# Altium PCB projet_pcb_F103.PCBDOC
Units mil, origin at the board's own origin, x right, y up, seen from the top; angles counter-clockwise.
Board outline 2810 x 2750 mil, 2 copper layers (TopLayer, BottomLayer); 21 components, 20 nets, 106 pads, 14 vias.
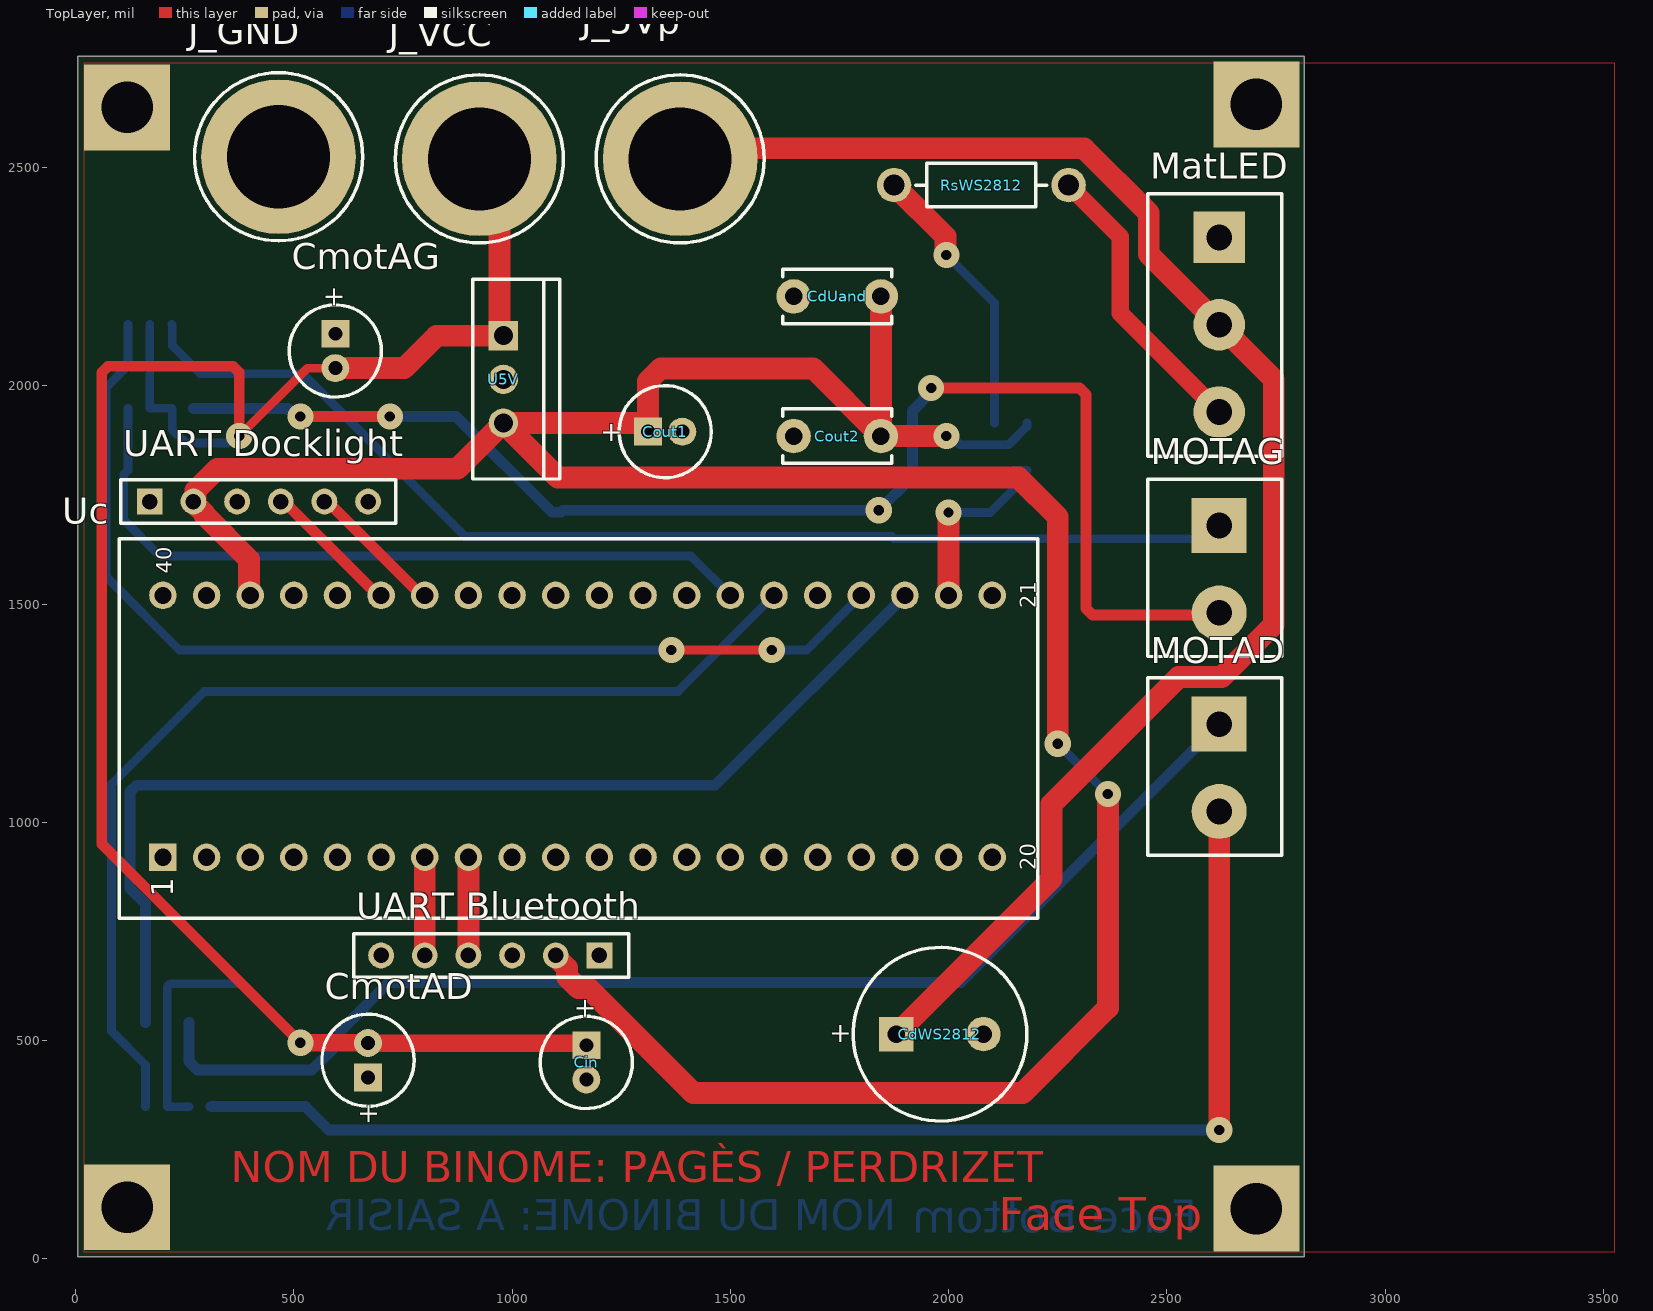
[diagram p0: TopLayer view]
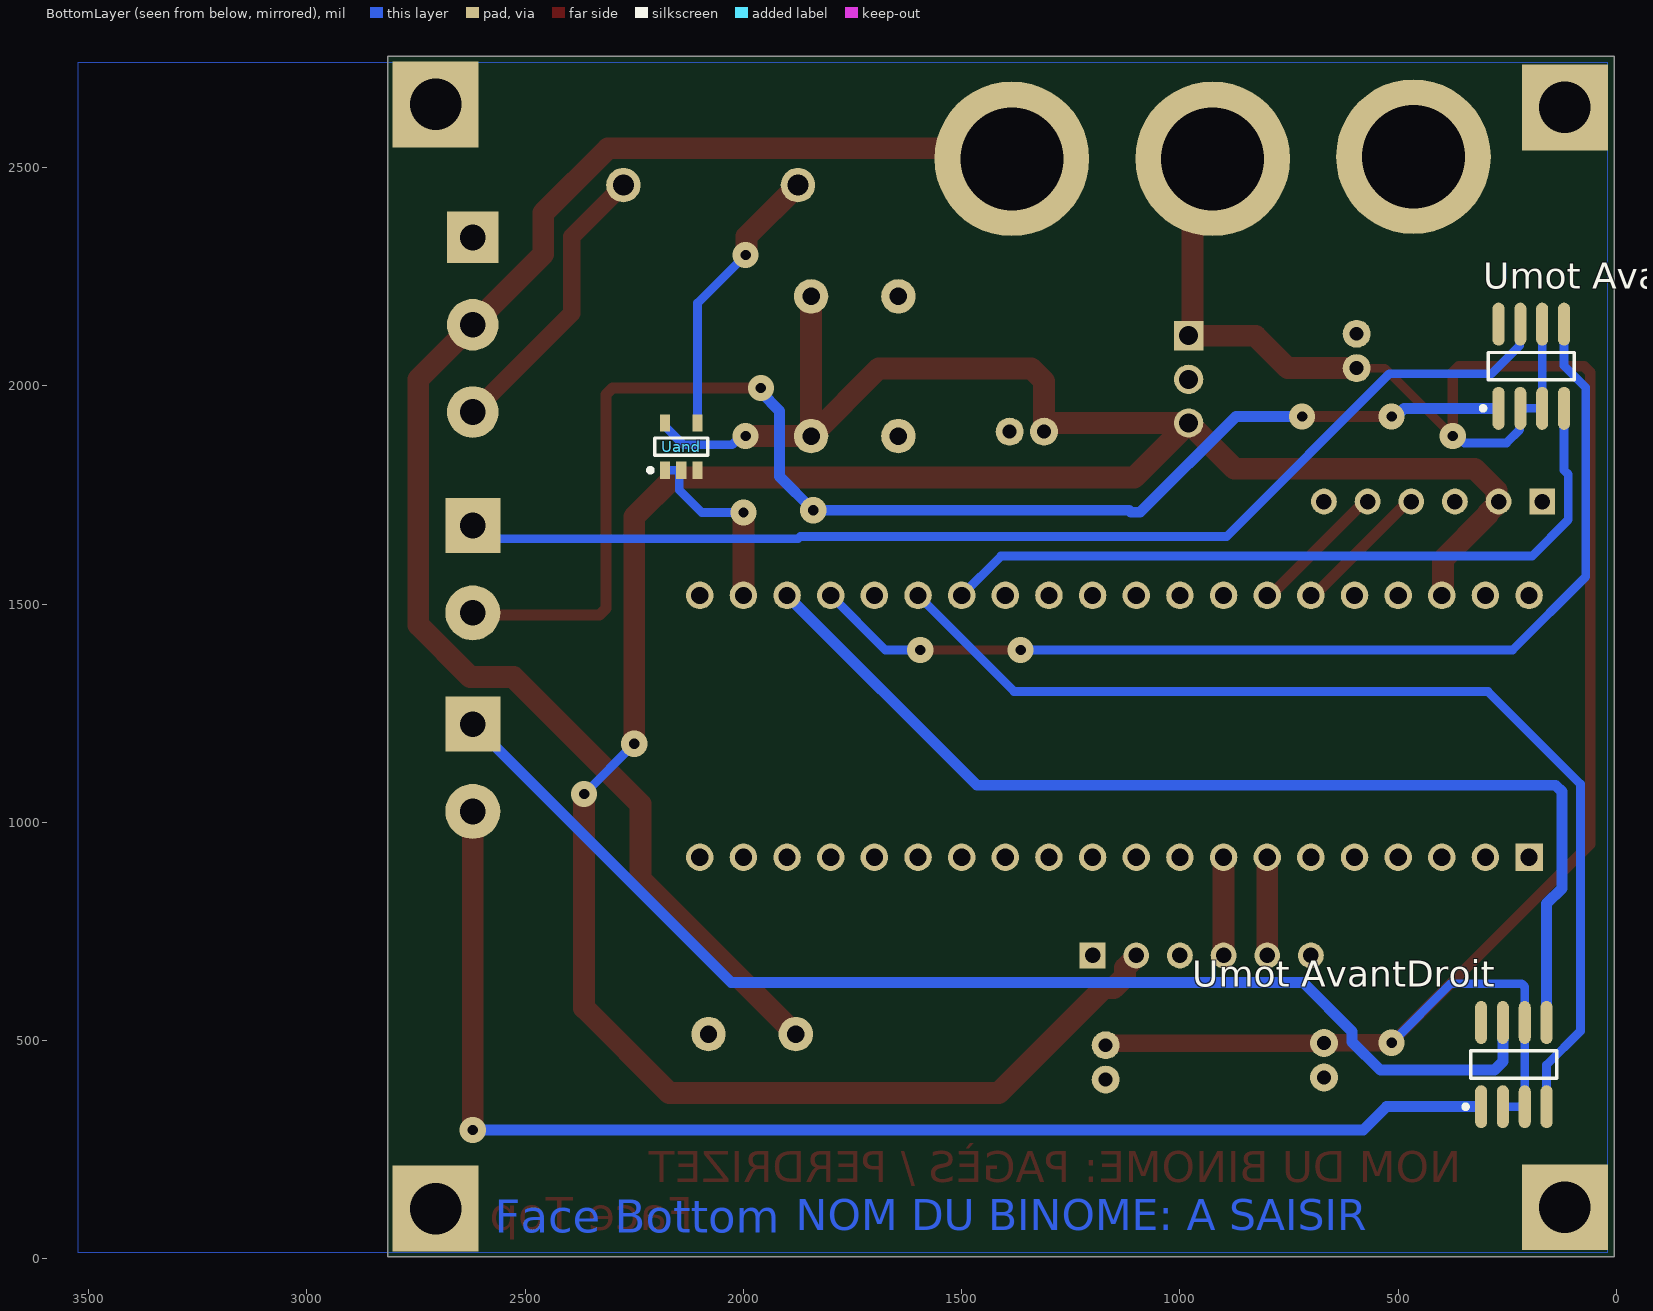
[diagram p1: BottomLayer view, seen from below]

## Layer stack, top to bottom
TopSolder: solder mask 0.4, Solder Resist, Dk 3.5
TopLayer: signal copper 1.4
Dielectric1: core 12.6, FR-4, Dk 4.8
BottomLayer: signal copper 1.4
BottomSolder: solder mask 0.4, Solder Resist, Dk 3.5

## Board outline
5,5 5,2755 2815,2755 2815,5
cut-out: 3005,2870
cut-out: 3340,-80

## Design rules (kind name [scope] priority, off if disabled: settings)
Clearance PowerPlaneClearance [InNamedPolygon('Bot-GND') Or  InNamedPolygon('Top-GND')] p1: gap=40 ignorepadtopadclearanceinfootprint=FALSE except(0: Arc-Hole Track-Hole SMDPad-Hole THPad-Hole Via-Hole Fill-Hole Poly-Hole Region-Hole Text-Hole)
Clearance [All] p2: gap=20 ignorepadtopadclearanceinfootprint=TRUE except(0: Arc-Hole Track-Hole SMDPad-Hole THPad-Hole Via-Hole Fill-Hole Poly-Hole Region-Hole Text-Hole)
FabricationTestPointUsage TestPointUsage [All] p1: valid=0 allowmultiple=FALSE
FabricationTestpoint Testpoint [All] p1: side=3 testpointundercomponent=TRUE minsize=40 maxsize=100 preferedsize=60 minholesize=20 maxholesize=40 preferedholesize=32 testpointgrid=1 allowsidetop=TRUE allowsidebottom=TRUE usegrid=TRUE gridtolerance=0.01
Height [All] p1: minheight=0 maxheight=2000 prefheight=500
HoleSize [All] p1: absolutevalues=TRUE maxlimit=300 minlimit=11.81 maxpercent=80.000 minpercent=20.000
PlaneClearance [All] p1: clearance=40
PlaneConnect [All] p1: planeconnectstyle=Relief reliefexpansion=19.68 reliefentries=4 reliefconductorwidth=40 reliefairgap=19.68
PolygonConnect [All] p1: connectstyle=Relief reliefconductorwidth=40 reliefentries=4 polygonreliefangle="90 Angle" airgapwidth=10
RoutingVias [All] p1: holewidth=23.62 width=60 viastyle="Through Hole" minholewidth=23.62 minwidth=60 maxholewidth=23.62 maxwidth=60
SilkToSolderMaskClearance SilkscreenOverComponentPads [IsPad] p1: minsilkscreentomaskgap=10 clearancetoexposedcopper=TRUE
SolderMaskExpansion [All] p1: expansion=2
Width [All] p1: maxlimit=1000 minlimit=20 preferedwidth=40
23 further rules are at their usual default settings.

## Classes and differential pairs
component class projet_pcb_F103: CdUand CdWS2812 Cin CmotAG Cout1 Cout2 J_5Vp J_GND J_VCC MatLED MOTAD MOTAG RsWS2812 U5V Uand "UART Bluetooth" "UART Docklight" "Umot AvantDroit" "Umot AvantGauche"

## Components (designator, comment, footprint, x,y, rotation, side; value= is the part's Value field where it differs from the comment)
CdUand "CONDENSATEUR_CER_RAD_5.08" CONDENSATEUR_CERAMIQUE_RADIAL_5.08 1645,2205 r0 top value=100nF
CdWS2812 "CONDENSATEUR_POL_ELECTROLY_RAD_5.08/10.16" CONDENSATEUR_POLARISE_ELECTROLYTIQUE_RADIAL_5.08/10.16 1880,515 r0 top value=470µF/25V
Cin "CONDENSATEUR_POL_ELECTROLY_RAD_2.0/5.08" CONDENSATEUR_POLARISE_ELECTROLYTIQUE_RADIAL_2.0/5.08 1170,450 r270 top value=10µF/>25V
CmotAD "10uF" CONDENSATEUR_POLARISE_ELECTROLYTIQUE_RADIAL_2.0/5.08 670,455 r90 top
CmotAG "10uF" CONDENSATEUR_POLARISE_ELECTROLYTIQUE_RADIAL_2.0/5.08 595,2080 r270 top
Cout1 "CONDENSATEUR_POL_ELECTROLY_RAD_2.0/5.08" CONDENSATEUR_POLARISE_ELECTROLYTIQUE_RADIAL_2.0/5.08 1350.63,1895 r0 top value=1µF/>10V
Cout2 "CONDENSATEUR_CER_RAD_5.08" CONDENSATEUR_CERAMIQUE_RADIAL_5.08 1645,1885 r0 top
J_5Vp "DOUILLE BANANE 4mm" DOUILLE_BANANE_4mm#1 1385,2520 r0 top
J_GND "DOUILLE BANANE 4mm" DOUILLE_BANANE_4mm#2 465,2525 r0 top
J_VCC "DOUILLE BANANE 4mm" DOUILLE_BANANE_4mm#2 925,2520 r0 top
MatLED "BORNIER3 DROIT A VIS" BORNIER3_A_VIS 2620,2340 r270 top
MOTAD "BORNIER2 DROIT A VIS" BORNIER2_A_VIS 2620,1225 r270 top
MOTAG "BORNIER2 DROIT A VIS" BORNIER2_A_VIS 2620,1680 r270 top
RsWS2812 "220" RESISTANCE_1/4W 2275,2460 r180 top
U5V "REGULATEUR_TO220_78XX" REGULATEUR_TO220_78XX 980,2015 r270 top
Uand "SN74AHCT1G08DBVR" DBV0005A_N 2142.4,1860.87 r90 bottom
"UART Bluetooth" "BARRETTE_6 CONTACTS_1 RANGEE_FEMELLE_DROITE" BARRETTE_6_F_D 1200,695 r180 top
"UART Docklight" "BARRETTE_6 CONTACTS_1 RANGEE_FEMELLE_DROITE" BARRETTE_6_F_D 170,1735 r0 top
Uc "STM32F103C8T6/PCB_DIP40" STM32F103C8T6_DIP40 200,920 r90 top
"Umot AvantDroit" "BD6221F-E2" SOIC8_PAS=1.27_LARG=4_LONG=5 235,445 r90 bottom
"Umot AvantGauche" "BD6221F-E2" SOIC8_PAS=1.27_LARG=4_LONG=5 195,2045 r90 bottom

## Footprints (in the part's own frame and the unit in brackets; to place one, negate y for a bottom-side part, rotate by r counter-clockwise, add the part's x,y. Pads: shape width x height; smd on the part's side, far side on the other; paste and mask are expansions set on the pad)
BARRETTE_6_F_D [mm] "BARRETTE 6 CONTACTS ; 1 RANGEE ; DROITE ; FEMELLE ; ESPACEMENT BROCHES = 2.54 mm"
  rect 1.5x1.5 hole 0.9: 1(0,0)
  round 1.5 hole 0.9: 2(2.54,0) 3(5.08,0) 4(7.62,0) 5(10.16,0) 6(12.7,0)
  silkscreen extent -1.7,-1.27 14.3,1.27, body extent -1.57,-1.2 14.17,1.21, height 8.5
BORNIER2_A_VIS [mm] "BORNIER 2 PLOTS A VIS ; VERTICAL ; ESPACEMENT BROCHES = 5.08mm"
  rect 3.2x3.2 hole 1.5: 1(0,0)
  round 3.2 hole 1.5: 2(5.08,0)
  silkscreen extent -2.69,-4.15 7.62,3.63, body extent -2.5,-4 7.5,3.5, height 10
BORNIER3_A_VIS [mm] "BORNIER 3 PLOTS A VIS ; VERTICAL ; ESPACEMENT BROCHES = 5.08mm"
  rect 3x3 hole 1.5: 1(0,0)
  round 3 hole 1.5: 2(5.08,0) 3(10.16,0)
  silkscreen extent -2.54,-4.16 12.74,3.64, body extent -2.4,-4 12.6,3.5, height 10
CONDENSATEUR_CERAMIQUE_RADIAL_5.08 [mil] "CONDENSATEUR TRAVERSANT CERAMIQUE RADIAL ; DIMENSIONS : 3.17mm x 5.08mm"
  round 79 hole 40: 1(0,0) 2(200,0)
  silkscreen extent -25,-62 225,62, body extent -11,-43 209,42, height 148
CONDENSATEUR_POLARISE_ELECTROLYTIQUE_RADIAL_2.0/5.08 [mil] "CONDENSATEUR POLARISE ELECTROLYTIQUE RADIAL ; DIAMETRE : 5.08mm ; ESPACEMENT BROCHES : 2mm"
  rect 64x64 / inner round 64 / far side round 64 hole 32: 1(-39.37,0)
  round 64 hole 32: 2(39.37,0)
  silkscreen extent -106,-105 106,106, body extent -98,-98 98,98, height 433
CONDENSATEUR_POLARISE_ELECTROLYTIQUE_RADIAL_5.08/10.16 [mil] "CONDENSATEUR POLARISE ELECTROLYTIQUE RADIAL ; DIAMETRE : 10.16mm ; ESPACEMENT BROCHES : 5.08mm"
  rect 79x79 / inner round 79 / far side round 79 hole 40: 1(0,0)
  round 79 hole 40: 2(200,0)
  silkscreen extent -98,-199 299,198, body extent -98,-197 295,197, height 630
DBV0005A_N [mm] "SOT23, 5-Leads, Body 3.05x1.75mm, Pitch 0.95mm, IPC Medium Density"
  rect 1x0.6 smd: 1(-1.375,0.95) 2(-1.375,0) 3(-1.375,-0.95) 4(1.375,-0.95) 5(1.375,0.95)
  silkscreen extent -1.5,-1.55 0.5,1.93, body extent -1.42,-1.46 1.42,1.46, height 1.08
DOUILLE_BANANE_4mm#1 [mm] "DOUILLE BANANE ; DIAMETRE PASSAGE CONTACT = 4 mm ; DIAMETRE PERCAGE = 6 mm"
  round 9 hole 6: 1(0,0)
  TopLayer pour cut-out: -5.55,2.35 -4.2,4.3 -2.3,5.6 0,6 2.3,5.6 4.2,4.3 5.55,2.35 6,0 5.55,-2.35 4.3,-4.25 2.35,-5.55 0,-6 -2.35,-5.55 -4.2,-4.3 -5.55,-2.35 -6,0
  BottomLayer pour cut-out: -5.55,2.35 -4.2,4.3 -2.3,5.6 0,6 2.3,5.6 4.2,4.3 5.55,2.35 6,0 5.55,-2.35 4.3,-4.25 2.35,-5.55 0,-6 -2.35,-5.55 -4.2,-4.3 -5.55,-2.35 -6,0
  silkscreen extent -4.89,-4.89 4.89,4.89, body extent -5.5,-5.6 5.63,5.53, height 4.79
DOUILLE_BANANE_4mm#2 [mm] "DOUILLE BANANE ; DIAMETRE PASSAGE CONTACT = 4 mm ; DIAMETRE PERCAGE = 6 mm"
  round 9 hole 6: 1(0,0)
  silkscreen extent -4.89,-4.89 4.89,4.89, body extent -5.5,-5.6 5.63,5.53, height 4.79
REGULATEUR_TO220_78XX [mm] "BOITIER TO220 ; DIMENSIONS : 11.2mm x 4.7mm ; ESPACEMENT BROCHES : 2.54 mm"
  rect 1.7x1.7 hole 1.1: 1(-2.54,0)
  round 1.7 hole 1.1: 2(0,0) 3(2.54,0)
  silkscreen extent -5.83,-1.77 5.8,3.29, body extent -5.61,-1.59 5.61,3.1, height 19.33
RESISTANCE_1/4W [mil] "RESISTANCE 0.25W; DIAMETRE : 2.54mm ; LONGUEUR : 6.35mm ; PAS : 10.16mm"
  round 79 hole 48: 1(0,0) 2(400,0)
  silkscreen extent 50,-50 350,50, body extent -15,-47 409,44, height 116
SOIC8_PAS=1.27_LARG=4_LONG=5 [mm] "Small Outline Integrated Circuit ; 8 Leads ; Body Width = 4 mm ; Pitch = 1.27 mm ; IPC Low Density"
  oval 2.5x0.7 smd: 1(-2.45,1.905) 2(-2.45,0.635) 3(-2.45,-0.635) 4(-2.45,-1.905) 5(2.45,-1.905) 6(2.45,-0.635) 7(2.45,0.635) 8(2.45,1.905)
  silkscreen extent -2.57,-2.5 0.8,2.93, body extent -3.01,-2.5 3,2.5, height 1.75
STM32F103C8T6_DIP40 [mm] "STM32F103 monté sur DIP40"
  rect 1.6x1.6 hole 1: 1(0,0)
  round 1.6 hole 1: 2(0,-2.54) 3(0,-5.08) 4(0,-7.62) 5(0,-10.16) 6(0,-12.7) 7(0,-15.24) 8(0,-17.78) 9(0,-20.32) 10(0,-22.86) 11(0,-25.4) 12(0,-27.94) 13(0,-30.48) 14(0,-33.02) 15(0,-35.56) 16(0,-38.1) 17(0,-40.64) 18(0,-43.18) 19(0,-45.72) 20(0,-48.26) 21(15.24,-48.26) 22(15.24,-45.72) 23(15.24,-43.18) 24(15.24,-40.64) 25(15.24,-38.1) 26(15.24,-35.56) 27(15.24,-33.02) 28(15.24,-30.48) 29(15.24,-27.94) 30(15.24,-25.4) 31(15.24,-22.86) 32(15.24,-20.32) 33(15.24,-17.78) 34(15.24,-15.24) 35(15.24,-12.7) 36(15.24,-10.16) 37(15.24,-7.62) 38(15.24,-5.08) 39(15.24,-2.54) 40(15.24,0)
  silkscreen extent -3.56,-50.92 18.54,2.54, body extent -3.63,-51.04 18.37,6.1, height 20.63

## Part data
CdUand Cout2: "CONDENSATEUR TRAVERSANT CERAMIQUE RADIAL 5.08mm"
  CdUand: Type=RADIAL_5.08
CdWS2812: "CONDENSATEUR POLARISE ELECTROLYTIQUE RADIAL 5.08/10.16", Type=POL_RAD_5.08/10.16
Cin Cout1: "CONDENSATEUR POLARISE ELECTROLYTIQUE RADIAL 2.0/5.08", Type=POL_RAD_2.0/5.08
CmotAD CmotAG: library part Condensateur, "Capacitor", LatestRevisionDate=17-Jul-2002, LatestRevisionNote="Re-released for DXP Platform.", PackageReference=RAD-0.3, Published=8-Jun-2000, Publisher="Altium Limited"
J_5Vp J_GND J_VCC: library part DOUILLE_BANANE_4mm, "DOUILLE BANANE 4 mm", Type=BANANE_4mm
MatLED: library part "BORNIER3_DROIT_A VIS", "BORNIER 3 PLOTS DROIT A VIS 5.08mm", Type=BORNIER3_D
MOTAD MOTAG: library part "BORNIER2_DROIT_A VIS", "BORNIER 2 PLOTS DROIT A VIS 5.08mm", Type=BORNIER2_D
RsWS2812: library part Resistor, "Resistor", LatestRevisionDate=17-Jul-2002, LatestRevisionNote="Re-released for DXP Platform.", PackageReference=AXIAL-0.5, Published=8-Jun-2000, Publisher="Altium Limited"
U5V: "REGULATEUR DE TENSION POSITIVE 78XX BOITIER TO220", Package=(TO220), Type=7805
Uand: "Single 2-Input Positive-AND Gate, DBV0005A, LARGE T&R", F @ Nom Voltage(Max)(Mhz)=75, Generic Part Number=SN74AHCT1G08, ICC @ Nom Voltage(Max)(mA)=0.01, Manufacturer="Texas Instruments", Operating Temperature Range(C)="-40 to 125", Rating=Catalog, Supplier Part Number 1=595-SN74AHCT1G08DBVR, tpd @ Nom Voltage(Max)(ns)=7.1, Voltage(Nom)(V)=5, 3-State Output=No, Bits(#)=1, ComponentLink1Description="Manufacturer URL", ComponentLink1URL=http://www.ti.com/, ComponentLink2Description=Datasheet, ComponentLink2URL=http://www.ti.com/lit/ds/symlink/sn74ahct1g08.pdf, DatasheetVersion=SCLS315P, Gate Type=AND, Input Type=CMOS, Logic=True, Output Drive (IOL/IOH)(Max)(mA)=8/-8, Output Type=CMOS, PackageReference=DBV0005A, PartNumber=SN74AHCT1G08DBVR, Schmitt Trigger=No, Sub-Family="AND Gate", Supplier 1=Mouser, Supplier 2=Digi-Key, Supplier 3=Digi-Key, Supplier 4=Digi-Key, Supplier Part Number 2=296-1113-2-ND, Supplier Part Number 3=296-1113-1-ND, Supplier Part Number 4=296-1113-6-ND, Technology Family=AHCT, VCC(Max)(V)=5.5, VCC(Min)(V)=2
"UART Bluetooth" "UART Docklight": "BARRETTE 6 CONTACTS 1 RANGEE FEMELLE DROITE", Type=F_D_6
Uc: "MICROCONTROLEUR 32 BITS - 72MHz - 34 I/O - 64 KO : FLASH - 20KO RAM - 10 CANAUX A/D 12 BITS - DIP40 - UART, SPI, I2C, USB, CAN", Package=DIP40, Type=STM32F103C8T6
"Umot AvantDroit" "Umot AvantGauche": library part BD6220F, "H Bridge - 2A"

## Free pads (board coordinates)
  rect 196.85x196.85 hole 118.11: 1(118.11,2637.8) 2(118.11,118.11) 3(2705,115) 4(2705,2645)

## Via types
v1: diameter 60, hole 23.62, TopLayer to BottomLayer, 14 vias

## Nets (pads, with @x,y where several pads share a name; then routed paths per layer and width w, separated by ;. In a path a pad name is that pad's centre, name@x,y a point inside that pad or via, vN(x,y) a via of type N, cw(c..) or ccw(c..) an arc to the next point about the centre after c; other vN are vias at no path point)
+3V3_BP: Uc.40
+5V: "UART Bluetooth.2" "UART Docklight.2" CdUand.2 Cout1.1 Cout2.2 U5V.3 Uand.5 Uc.38 | length 6840.1
  TopLayer w50: Uc.38 397.51,1522.49 397.51,1602.09 295.47,1704.13 295.47,1707.08 270,1732.55 270,1735 270,1737.45 275,1742.45 275,1760.38 324.62,1810 875,1810 U5V.3 ; 1100,695 1100,692.55 1125.47,667.08 1125.47,646.83 1151.83,620.47 1174.53,620.47 1415,380 2170,380 2365,575 v1(2365,1065) ; CdUand.2 Cout2.2 ; v1(1995,1885) Cout2.2 ; v1(2250,1180) 2250,1700 2160,1790 1105,1790 U5V.3 ; U5V.3 1291.26,1915 Cout1.1 1311.26,2010.71 1340.55,2040 1690,2040 Cout2.2
  BottomLayer w20: v1(1995,1885) 2005.82,1885 2025.51,1865.31 2137.99,1865.31 2179.8,1907.13 Uand.5 ; v1(2250,1180) v1(2365,1065)
+5VP: CdWS2812.1 J_5Vp.1 MatLED.2 | length 3561
  TopLayer w50: J_5Vp.1 1409.5,2544.5 2310,2544.5 2458.44,2396.06 2458.44,2301.56 MatLED.2 2745,2015 2745,1452.28 2625.72,1332.99 2526.93,1332.99 2235.94,1042.01 2235.94,870.94 CdWS2812.1
GND: "UART Bluetooth.3" "UART Docklight.3" "Umot AvantDroit.8" "Umot AvantGauche.8" CdUand.1 CdWS2812.2 Cin.2 CmotAD.1 CmotAG.1 Cout1.2 Cout2.1 J_GND.1 MatLED.1 pad.3 pad.4 U5V.2 Uand.3 Uc.19 Uc.20 Uc.39 | length 106.9
  TopLayer w40: Uc.39 Uc.39@304.4,1524.4 ; J_GND.1@414.4,2474.4 437.5,2497.5 J_GND.1 ; J_GND.1@414.4,2479.4 J_GND.1@435,2500
MOTAD_1: "Umot AvantDroit.1" MOTAD.2 | length 3062.2
  TopLayer w50: v1(2620,295) MOTAD.2
  BottomLayer w25: 310,348.54 526.46,348.54 580,295 v1(2620,295)
MOTAD_2: "Umot AvantDroit.7" MOTAD.1 | length 2799.8
  BottomLayer w25: 260,541.46 260,452.14 279.64,432.5 540.89,432.5 605.5,497.11 605.5,521.09 717.39,632.97 2027.97,632.97 MOTAD.1
MOTAG_1: "Umot AvantGauche.1" MOTAG.2 | length 3168.7
  TopLayer w25: v1(515,1930) v1(720,1930) ; v1(1840,1715) v1@1842.5,1712.5 ; v1(1960,1995) 2300.36,1995 2315,1980.36 2315,1489.64 2329.64,1475 2615,1475 MOTAG.2
  BottomLayer w25: 270,1948.54 486.99,1948.54 505.53,1930 v1(515,1930) ; v1(720,1930) 871.71,1930 1091.36,1710.36 1112.07,1710.36 1116.71,1715 v1(1840,1715) 1917,1792 1917,1942.54 1960,1985.54 v1(1960,1995)
MOTAG_2: "Umot AvantGauche.7" MOTAG.1 | length 2643.7
  BottomLayer w20: 220,2141.46 221.45,2140.01 221.45,2092.66 286.35,2027.76 520.19,2027.76 892.95,1655 1869.85,1655 1874.85,1650 2590,1650 MOTAG.1
NetMatLED_3: MatLED.3 RsWS2812.1 | length 662.9
  TopLayer w40: RsWS2812.1 2393.44,2341.56 2393.44,2166.56 MatLED.3
NetRsWS2812_2: RsWS2812.2 Uand.4 | length 640.3
  TopLayer w50: RsWS2812.2 1993.09,2341.91 1993.09,2301.91 v1(1995,2300)
  BottomLayer w20: v1(1995,2300) 2105,2190 Uand.4
PA2_U2TX: "UART Bluetooth.5" Uc.7 | length 231.2
  TopLayer w40: Uc.7@795.6,915.6 Uc.7
  TopLayer w50: 800,695 Uc.7
PA3_U2RX: "UART Bluetooth.4" Uc.8 | length 225
  TopLayer w50: 900,695 Uc.8
PA9_PWM2: "Umot AvantDroit.4" Uc.26 | length 2468
  BottomLayer w20: 160,348.54 160,444.11 82.5,521.61 82.5,1087.96 294.41,1299.87 1379.87,1299.87 Uc.26
PA10_PWM3: "Umot AvantGauche.4" Uc.27 | length 1720.6
  BottomLayer w20: 120,1948.54 120,1806.82 110.47,1797.29 110.47,1693.05 193.52,1610 1410,1610 Uc.27
PB6_U1TX: "UART Docklight.5" Uc.34 | length 322.6
  TopLayer w25: 570,1735 577.5,1735 792.5,1520 Uc.34
  TopLayer w50: Uc.34 Uc.34@802.49,1522.49
PB7_U1RX: "UART Docklight.4" Uc.35 | length 321.5
  TopLayer w25: 470,1735 477.5,1735 692.5,1520 Uc.35
  TopLayer w50: 470,1732.55 470,1735
PB13_LEDS_WS2812: Uand.1 Uand.2 Uc.22 | length 436.4
  TopLayer w50: Uc.22 v1(2000,1710)
  BottomLayer w20: v1(2000,1710) 2095.35,1710 2146.81,1761.46 2146.81,1806.73 Uand.1
PB14_PWM2N: "Umot AvantDroit.5" Uc.23 | length 2504.6
  BottomLayer w25: 160,541.46 160,813.79 125,848.79 125,1070.36 139.64,1085 1465,1085 Uc.23
PB15_PWM3N: "Umot AvantGauche.5" Uc.24 | length 2450.1
  TopLayer w20: v1(1365,1395) v1(1595,1395)
  BottomLayer w20: 120,2141.46 120,2045.89 70.47,1996.36 70.47,1562.56 238.03,1395 v1(1365,1395) ; v1(1595,1395) 1675,1395 Uc.24
VCC: "Umot AvantDroit.2" "Umot AvantDroit.3" "Umot AvantDroit.6" "Umot AvantGauche.2" "Umot AvantGauche.3" "Umot AvantGauche.6" Cin.1 CmotAD.2 CmotAG.2 J_VCC.1 U5V.1 | length 5135.1
  TopLayer w20: v1(375,1885) 530.63,2040.63 CmotAG.2
  TopLayer w25: v1(375,1885) 375,2030.36 360.36,2045 74.64,2045 60,2030.36 60,950 v1(515,495)
  TopLayer w40: v1(515,495) 515.31,494.69 669.69,494.69 CmotAD.2 1165,494.37 Cin.1
  TopLayer w50: CmotAG.2 752.68,2040.63 827.05,2115 U5V.1 971.54,2123.46 971.54,2473.46 J_VCC.1
  BottomLayer w20: 170,2141.46 170,1948.54 220,1948.54 221.45,1947.1 221.45,1899.75 251.87,1869.33 348.51,1869.33 364.18,1885 v1(375,1885) ; 260,348.54 210,348.54 210,541.46 210,623.28 216.72,630 380,630 v1(515,495)
pads on no net: "UART Bluetooth.1" "UART Bluetooth.6" "UART Docklight.1" "UART Docklight.6" Uc.1 Uc.2 Uc.3 Uc.4 Uc.5 Uc.6 Uc.9 Uc.10 Uc.11 Uc.12 Uc.13 Uc.14 Uc.15 Uc.16 Uc.17 Uc.18 Uc.21 Uc.25 Uc.28 Uc.29 Uc.30 Uc.31 Uc.32 Uc.33 Uc.36 Uc.37

## Polygon pours and split planes (outlines as drawn)
GND on BottomLayer "Bot-GND" (solid, shelved, pour order 5): 20,2740 3525,2740 3525,15 20,15
GND on TopLayer "Top-GND" (solid, shelved, pour order 4): 20,2740 3525,2740 3525,15 20,15

## Other copper
TopLayer:
  text "NOM DU BINOME: PAGÈS / PERDRIZET" at 355,175 h70.87
  text "Face Top" at 2115,65 h75
BottomLayer:
  text "NOM DU BINOME: A SAISIR" at 1880,65 h70.87
  text "Face Bottom" at 2570,60 h75

## Silkscreen, mask and mechanical layers (free items; w line width, h text height)
TopOverlay:
  text "Consignes / Conseils :" at 13185,2120 h393.7
  text "1- désactivez la fonctionnalité \"online DRC\"" at 13670,1755 h393.7
  text "Tools->Preferences -> décocher 'online DRC'" at 14145,1370 h393.7
  text "Tools->Reset error markers" at 14160,945 h393.7
  text "2- Déplacez les plans de masse en dehors de la carte" at 13665,520 h393.7
  text "3- Si elles sont visibles / gênantes : masquez les couches mécaniques 3D" at 13640,-5 h393.7
  text "Bouton-droit sur les onglets (en bas) Mechanical1, 13 -> Hide" at 14190,-450 h393.7
  text "4- mettre vos noms à la place de \"nom du binôme\"" at 13635,-995 h393.7
  text "5- Par défaut, la taille de piste minimale est définie à 20 mils.  /     Si cela s'avère absolutement nécessaire (passage entre deux broches espacées de 2,54mm...), vous pouvez modifier ce réglage dans /     -> Design -> Rules -> Routing -> Width -> Width" at 13615,-2645 h393.7
  text "6- Par défaut, la clearance (espace minimale entre deux objets dont le net diffère) est reglée à 20 mils. /     Si cela s'avère nécessaire (petit composant CMS / volonté assumée d'une règle moins stricte), /      vous pouvez descendre à 10mils : /     -> Design -> Rules -> Electrical -> Clearance-> Clearance" at 13625,-4220 h393.7
Mechanical1:
  lines w20: 0,0 2815,0 2815,1360 2815,1395 2815,2760 0,2760 0,0

## Text inside footprints (layer, text, board x,y; h text height)
CdWS2812: TopOverlay "+" at 1726.06,495.71 h45
Cin: TopOverlay "+" at 1148.35,598.82 h45 r270
CmotAD: TopOverlay "+" at 691.65,306.18 h45 r90
CmotAG: TopOverlay "+" at 573.35,2228.82 h45 r270
Cout1: TopOverlay "+" at 1201.81,1873.35 h45
Uc: TopOverlay "21" at 2200,1490 h35.43 r90; TopOverlay "40" at 220,1570 h35.43 r90; TopOverlay "20" at 2200,890 h35.43 r90; TopOverlay "1" at 223.62,829.45 h50 r90